# Altium PCB A00B02-PURE.PcbDoc
Units mil, origin at the board's own origin, x right, y up, seen from the top; angles counter-clockwise.
Board outline 2070.03 x 770.03 mil, 2 copper layers (Top Layer, Bottom Layer); 35 components, 26 nets, 117 pads, 172 vias.
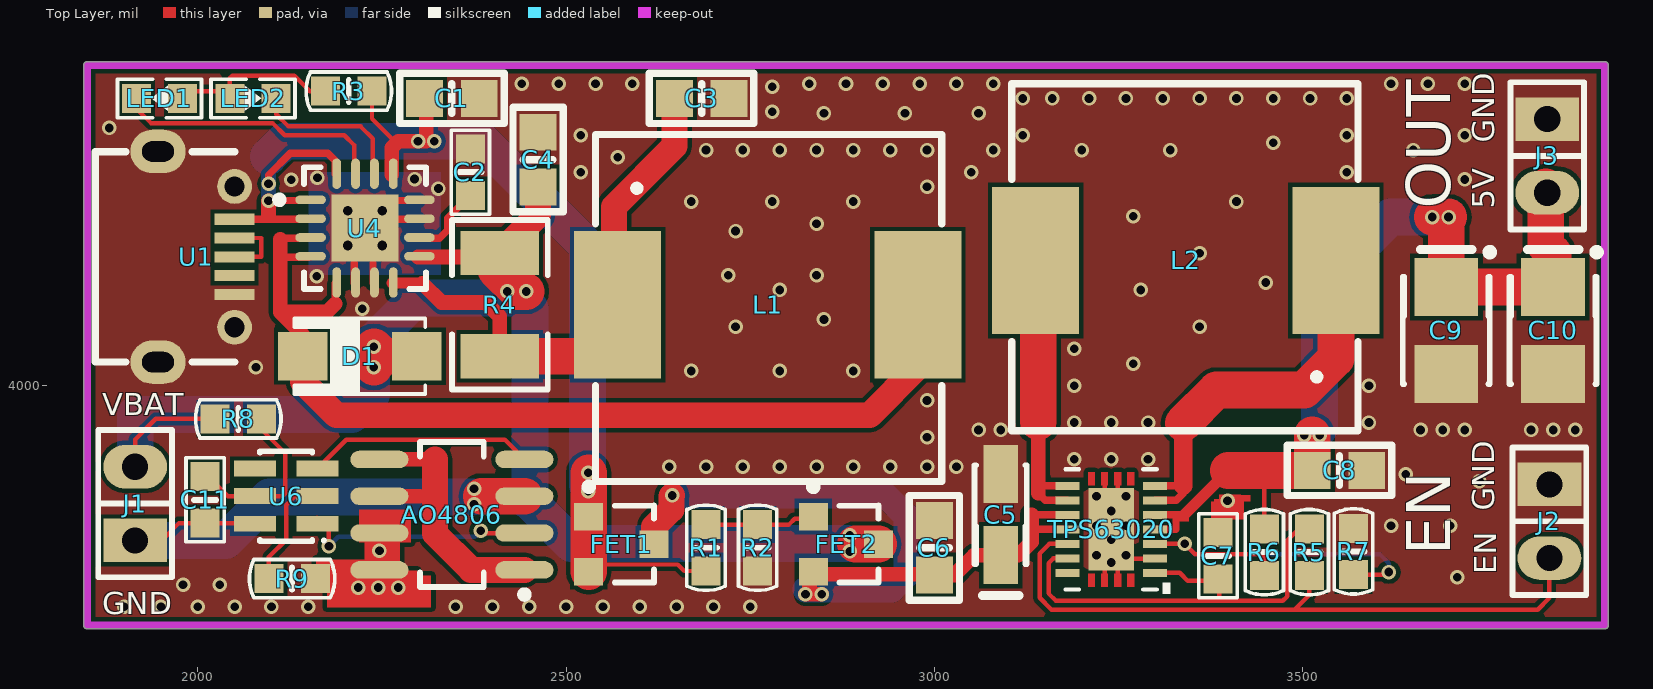
[diagram p0: Top Layer view]
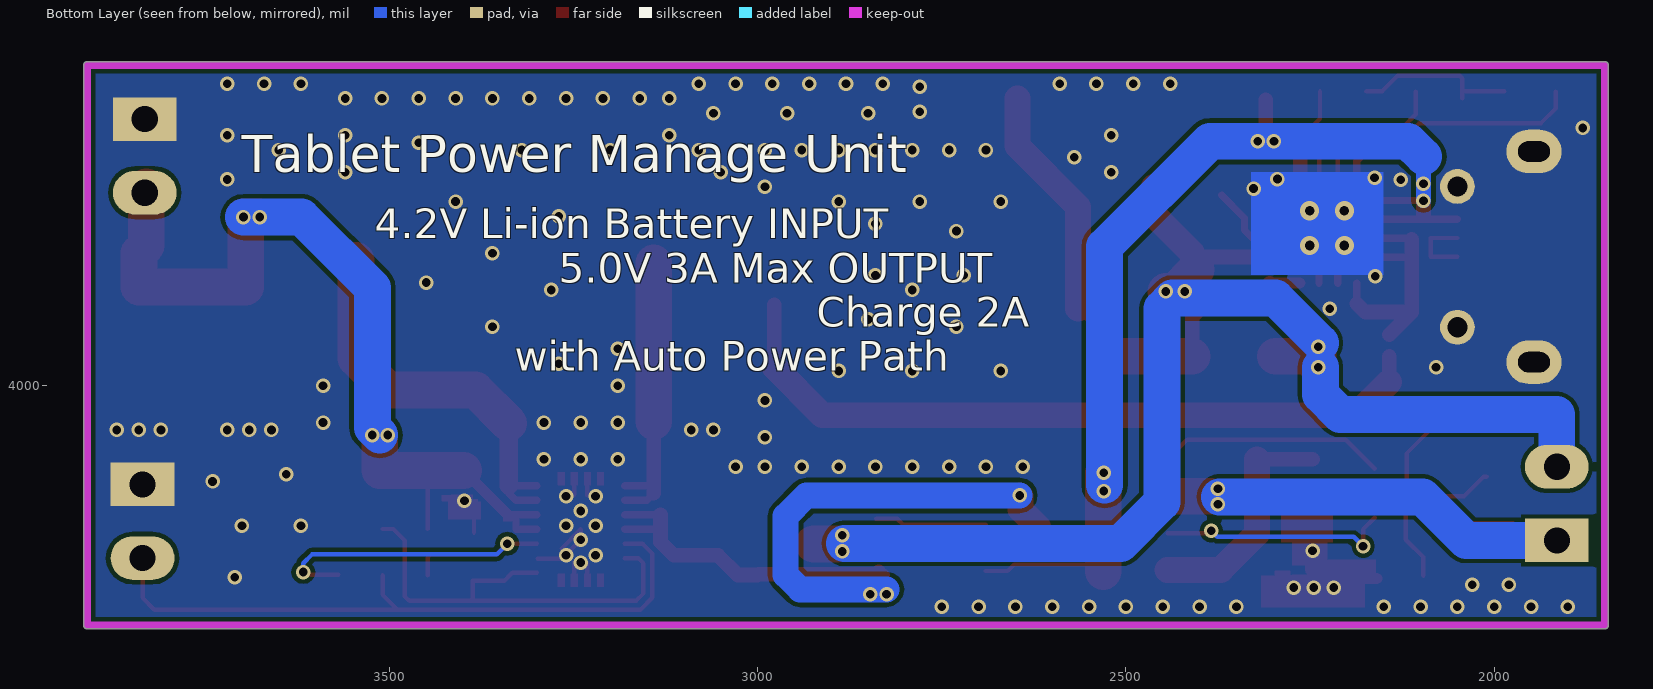
[diagram p1: Bottom Layer view, seen from below]

## Layer stack, top to bottom
Top Solder: solder mask 0.4, Solder Resist, Dk 3.5
Top Layer: signal copper 1.4
Dielectric 1: dielectric 12.6, FR-4, Dk 4.8
Bottom Layer: signal copper 1.4
Bottom Solder: solder mask 0.4, Solder Resist, Dk 3.5

## Board outline
1850,3669.99 cw(c1850,3675) 1844.98,3675 1844.98,4435 cw(c1850,4435) 1850,4440.02 3910,4440.02 cw(c3910,4435) 3915.01,4435 3915.01,3675 cw(c3910,3675) 3910,3669.99

## Design rules (kind name [scope] priority, off if disabled: settings)
Clearance [All] p1: gap=6
PlaneConnect PlaneConnect_1 [InNet('GND')] p1: planeconnectstyle=Direct reliefexpansion=20 reliefentries=4 reliefconductorwidth=10 reliefairgap=10
PlaneConnect [All] p2: planeconnectstyle=Relief reliefexpansion=20 reliefentries=4 reliefconductorwidth=10 reliefairgap=10
PolygonConnect PolygonConnect_1 [InNet('GND')] p1: connectstyle=Direct reliefconductorwidth=10 reliefentries=4 polygonreliefangle="90 Angle" airgapwidth=10
PolygonConnect [All] p2: connectstyle=Relief reliefconductorwidth=10 reliefentries=4 polygonreliefangle="90 Angle" airgapwidth=10
RoutingVias [All] p1: holewidth=28 width=50 viastyle="Through Hole" minholewidth=28 minwidth=50 maxholewidth=28 maxwidth=50
SolderMaskExpansion [All] p1: expansion=4
Width [All] p1: maxlimit=200 minlimit=6 preferedwidth=10 minimp=50.000000 maximp=50.000000 favimp=50.000000
29 further rules are at their usual default settings.

## Components (designator, comment, footprint, x,y, rotation, side; value= is the part's Value field where it differs from the comment)
AO4806 "U7" SOP-8 2345,3825 r180 top
C1 "22uF 0805" SMT_C_0805 2345,4390 r0 top
C2 "0.1uF" SMT_C_0603 2370,4290 r270 top
C3 "22uF 0805" SMT_C_0805 2684,4390 r0 top
C4 "22uF 0805" SMT_C_0805 2462,4307 r90 top
C5 "100uF 6.3V" SMT_C_Tantalum_A 3090,3825 r90 top
C6 "22uF 6.3V" SMT_C_0805 3000,3780 r90 top
C7 "0.1uF" SMT_C_0603 3385,3769 r90 top
C8 "22uF 6.3V" SMT_C_0805 3550,3885 r0 top
C9 "220uF 6.3V" SMT_C_Tantalum_B 3695,4075 r270 top
C10 "220uF 6.3V" SMT_C_Tantalum_B 3840,4075 r270 top
C11 "100nF" SMT_C_0603 2010,3845 r90 top
D1 "SS24" SMT_DIODE_DO_214AC 2220,4040 r180 top
FET1 "AO3402-N-Ch-MOSFET" AO3402-N-Ch-MOSFET 2575,3785 r270 top
FET2 "AO3401-P-Ch-MOSFET" AO3401-P-Ch-MOSFET 2880,3785 r270 top
J1 "THT_Male_P_1x2" THT_Male_P_1x2-2.54mm 1915,3790 r180 top
J2 "THT_Male_P_1x2" THT_Male_P_1x2-2.54mm 3835,3866 r0 top
J3 "THT_Male_P_1x2" THT_Male_P_1x2-2.54mm 3832,4362 r0 top
L1 "4.7uH" SMT_L_11.5mm 2775,4105 r0 top
L2 "1uH" SMT_L_11.5mm 3340,4175 r180 top
LED1 "SMT_LED_0603" SMT_LED_0603 1948,4390 r180 top
LED2 "SMT_LED_0603" SMT_LED_0603 2075,4390 r0 top
R1 "100oHm" SMT_R_0603 2690,3780 r90 top
R2 "5.6K" SMT_R_0603 2760,3780 r270 top
R3 "1K" SMT_R_0603 2205,4400 r0 top
R4 "0.05R" 1210 2410,4110 r270 top
R5 "12K" SMT_R_0603 3509,3774 r270 top
R6 "1M" SMT_R_0603 3448,3774 r90 top
R7 "180K" SMT_R_0603 3569,3775 r270 top
R8 "100R" SMT_R_0603 2055,3955 r0 top
R9 "1k" SMT_R_0603 2128,3738 r180 top
TPS63020 "U5" VSON-14 3240,3805 r180 top
U1 "USB_Micro_5S_B" USB_MICRO_5S_B 2050,4175 r90 top
U4 "TP5000" QFN-16 2227,4214 r0 top
U6 "DW01-PLUS" SOT23-6 2120,3850 r90 top

## Footprints (in the part's own frame and the unit in brackets; to place one, negate y for a bottom-side part, rotate by r counter-clockwise, add the part's x,y. Pads: shape width x height; smd on the part's side, far side on the other; paste and mask are expansions set on the pad)
1210 [mil] "贴片元件"
  rect 60x106.3 smd: 1(-70,0) 2(70,0)
  silkscreen extent -115,-65 115,65, body extent -65,-50 65,50, height 39
AO3401-P-Ch-MOSFET [mm] "AO3401-P-Ch-MOSFET"
  rect 0.95x1 smd: 1(-0.95,-1.125) 2(0.95,-1.125) 3(0,1.125)
  silkscreen extent -2.1,-1.25 1.32,1.13, body extent -1.45,-1.4 1.45,1.4, height 1.3
AO3402-N-Ch-MOSFET [mm] "AO3402-N-Ch-MOSFET"
  rect 0.95x1 smd: 1(-0.95,-1.125) 2(0.95,-1.125) 3(0,1.125)
  silkscreen extent -2.1,-1.25 1.32,1.13, body extent -1.45,-1.4 1.45,1.4, height 1.3
QFN-16 [mm] "QFN"
  oval 1.05x0.3 smd: 1(-1.875,0.975) 2(-1.875,0.325) 3(-1.875,-0.325) 4(-1.875,-0.975) 9(1.875,-0.975) 10(1.875,-0.325) 11(1.875,0.325) 12(1.875,0.975)
  oval 0.3x1.05 smd: 5(-0.975,-1.875) 6(-0.325,-1.875) 7(0.325,-1.875) 8(0.975,-1.875) 13(0.975,1.875) 14(0.325,1.875) 15(-0.325,1.875) 16(-0.975,1.875)
  rect 2.3x2.3 smd: 17(0,0)
  silkscreen extent -3.07,-2.1 2.1,2.1, body extent -2.07,-2.07 2.07,2.07, height 0.8
SMT_C_0603 [mm] "Surface mount capacitor 0603"
  rect 1x1 smd: 1(-0.8,0) 2(0.8,0)
  silkscreen extent -1.45,-0.66 1.45,0.66, body extent -1,-0.39 1,0.39, height 0.79
SMT_C_0805 [mil] "Surface mount capacitor 0805"
  rect 50x50 smd: 1(-37,0) 2(37,0)
  silkscreen extent -71,-34 71,34, body extent -49,-24 49,25, height 31
SMT_C_Tantalum_A [mm] "Capacitor, SM Tantalum; Body 3.2 x 1.6 mm (LxW typ)"
  rect 2x1.2 smd: 1(-1.4,0) 2(1.4,0)
  silkscreen extent -2.79,-0.9 1.7,0.9, body extent -1.6,-0.8 1.6,0.8, height 1.6
SMT_C_Tantalum_B [mm] "Capacitor, SM Tantalum; Body 3.5 x 2.8 mm (LxW typ)"
  rect 2x2.2 smd: 1(-1.5,0) 2(1.5,0)
  silkscreen extent -2.82,-1.5 1.85,1.63, body extent -1.75,-1.4 1.75,1.4, height 1.9
SMT_DIODE_DO_214AC [mm] "DO-214AC(SMA) Package"
  rect 1.7x1.67 smd: 1(-1.965,0) 2(1.965,0)
  silkscreen extent -2.25,-1.3 2.25,1.3, body extent -2.6,-1.3 2.6,1.3, height 2.35
SMT_L_11.5mm [mil] "Vishay HLP4040 SMT Inductor,11.5x11.5x4mm"
  rect 118.11x200 smd: 1(-205,5) 2(202.5,5)
  silkscreen extent -235,-235 235,236, body extent -236,-235 235,236, height 157
SMT_LED_0603 [mm] "SMT LED"
  rect 1x1 smd: 1(-0.8,0) 2(0.8,0)
  silkscreen extent -1.45,-0.66 1.45,0.66, body extent -0.81,-0.4 0.81,0.4, height 0.6
SMT_R_0603 [mm] "Surface mount resistor 0603"
  rect 1x1 smd: 1(-0.8,0) 2(0.8,0)
  silkscreen extent -1.47,-0.66 1.47,0.66, body extent -1,-0.39 1,0.39, height 0.79
SOP-8 [mm] "8-Pin Small Outline Integrated Circuit 1.27 mm Pitch, IPC Low Density"
  oval 2x0.6 smd: 1(-2.5,1.905) 2(-2.5,0.635) 3(-2.5,-0.635) 4(-2.5,-1.905) 5(2.5,-1.905) 6(2.5,-0.635) 7(2.5,0.635) 8(2.5,1.905)
  silkscreen extent -2.63,-2.5 1.1,2.88, body extent -2.92,-2.45 2.86,2.45, height 1.45
SOT23-6 [mm] "SOT-457/SC-74; 6 Leads; Body 3 x 3 mm, inc. leads (LxW max)"
  rect 0.55x1.45 smd: 1(-0.95,-1.075) 2(0,-1.075) 3(0.95,-1.075) 4(0.95,1.075) 5(0,1.075) 6(-0.95,1.075)
  silkscreen extent -1.57,-1.35 1.55,0.9, body extent -1.45,-1.4 1.45,1.4, height 1.45
THT_Male_P_1x2-2.54mm [mm] "THT Male pin header strip 1x2 2.54mm pitch"
  rect 2.2x1.5 hole 0.9: 1(0,0)
  oval 2.2x1.5 hole 0.9: 2(0,-2.54)
  silkscreen extent -1.27,-3.81 1.27,1.27, body extent -1.46,-3.81 1.46,1.27, height 8.51
USB_MICRO_5S_B [mil] "USB Micro SMT 5S B"
  rect 15x54 smd: 1(51,0) 2(25.5,0) 3(0,0) 4(-25.5,0) 5(-51,0)
  oval 59.06x74.8 hole 27.56 slot 43.31 at 90 deg: 6(-143,104) 7(143,104)
  round 47.24 hole 27.5: 8(95.5,0) 9(-95.5,0)
  silkscreen extent -143,0 143,189, body extent -161,-9 161,204, height 105
VSON-14 [mm]
  rect 0.82x0.28 smd paste-0.397: 1(-1.51,1.5) 2(-1.51,1) 3(-1.51,0.5) 4(-1.51,0) 5(-1.51,-0.5) 6(-1.51,-1) 7(-1.51,-1.5) 8(1.51,-1.5) 9(1.51,-1) 10(1.51,-0.5) 11(1.51,0) 12(1.51,0.5) 13(1.51,1) 14(1.51,1.5)
  rect 1.58x2.85 smd paste-1.412 mask-1.41: 15(0,0)
  Top Layer region: -0.56,1.975 -0.56,1.527 -0.79,1.527 -0.79,1.975
  Top Layer region: -0.11,1.975 -0.11,1.527 -0.34,1.527 -0.34,1.975
  Top Layer region: 0.11,1.975 0.11,1.527 0.34,1.527 0.34,1.975
  Top Layer region: 0.56,1.975 0.56,1.527 0.79,1.527 0.79,1.975
  Top Layer region: 0.56,-1.975 0.56,-1.527 0.79,-1.527 0.79,-1.975
  Top Layer region: 0.11,-1.975 0.11,-1.527 0.34,-1.527 0.34,-1.975
  Top Layer region: -0.11,-1.975 -0.11,-1.527 -0.34,-1.527 -0.34,-1.975
  Top Layer region: -0.56,-1.975 -0.56,-1.527 -0.79,-1.527 -0.79,-1.975
  silkscreen extent -2.03,-2.07 1.58,2.22

## Part data
AO4806: library part AO4806
C1 C3 C4 C6 C8: library part SMT_C_0805, "Surface mount capacitor 0805"
C2 C7 C11: library part SMT_C_0603, "Surface mount capacitor 0603"
C5: library part SMT_C_Tantalum_A, "Capacitor, SM Tantalum; Body 3.2 x 1.6 mm (LxW typ)"
C9 C10: library part SMT_C_Tantalum_B, "Capacitor, SM Tantalum; Body 3.5 x 2.8 mm (LxW typ)"
D1: library part SMT_DIODE_SCHOTTKY_DO_214AC, "Surface mount schottky diode DO-214AC(SMA) Package"
FET1: "AO3402-N-Ch,4A,30V.RDS(ON) = 0.11Ω @ VGS = 2.5V"
FET2: "AO3401-P-Ch,-4.2A, -30V.RDS(ON) = 0.12Ω @ VGS = -2.5 V"
J1 J2 J3: "THT Male pin header strip 1x2"
L1 L2: library part SMT_L_11.5mm, "Vishay HLP4040 SMT Inductor,11.5x11.5x4mm"
LED1 LED2: "SMT LED"
R1 R2 R3 R5 R6 R7 R8 R9: library part SMT_R_0603, "Surface mount resistor 0603"
R4: library part SMT_R_0805, "Surface mount resistor 0805"
TPS63020: library part TPS63020
U1: "USB micro female SMT with 4 fixed foot"
U6: "One Cell Lithium-ion/Polymer Battery Protection IC"

## Via types
v1: diameter 19.68, hole 11.81, Top Layer to Bottom Layer, tented both sides, 168 vias
v2: diameter 25.98, hole 12.99, Top Layer to Bottom Layer, tented both sides, 4 vias

## Nets (pads, with @x,y where several pads share a name; then routed paths per layer and width w, separated by ;. In a path a pad name is that pad's centre, name@x,y a point inside that pad or via, vN(x,y) a via of type N, cw(c..) or ccw(c..) an arc to the next point about the centre after c; other vN are vias at no path point)
BAT_GND: AO4806.3 C11.1 J1.1 U6.6 | length 712.4
  Top Layer w6: J1.1 1951,3790 1974.5,3813.5 C11.1 U6.6@2076.77,3813.5
  Top Layer w50: 2385,3850 AO4806.3
  Bottom Layer w50: J1.1 2038,3790 2097,3849 2373,3849
  other v1: 2375,3839 2375,3860
CHG_STDBY: LED2.2 U4.14 | length 224
  Top Layer w6: LED2.2@2106.5,4399 2106.5,4368.5 2123,4352 2221,4352 2237.8,4335.2 U4.14@2237.8,4286.82
EN: J2.2 R5.2 TPS63020.12 | length 917.2
  Top Layer w6: TPS63020.12 3156.18,3785.31 3143,3772.13 3143,3712 3159,3696 3489,3696 ; R5.2 3509,3716 3489,3696 ; J2.2 3835,3712 3819,3696 3489,3696
GND: AO4806.7 AO4806.8 C1.2 C2.1 C3.2 C4.2 C5.2 C6.2 C7.2 C8.2 C9.2 C10.2 J2.1 J3.1 R2.2 R7.1 R9.1 TPS63020.2 TPS63020.15 U1.5 U1.6 U1.7 U1.8 U1.9 U4.6 U4.7 U4.11 U4.12 U4.17 | length 454
  Top Layer w6: TPS63020.15@3266,3779 TPS63020.15 v1(3240,3791) 3266,3765 TPS63020.2@3298.82,3765 ; C7.2 3385,3831 v1(3398,3844)
  Top Layer w10: U4.6@2212.2,4139.18 2212.2,4166.27 ; U4.7@2237.8,4139.18 2237.8,4166.27 ; U4.17@2263,4251.39 U4.12@2298.82,4251.39 ; U4.17@2271.73,4225.8 U4.11@2298.82,4225.8
  Top Layer w15: R9.1 2184,3738 2194,3748 AO4806.8@2219,3748
  Top Layer w20: AO4806.8 AO4806.7
  Top Layer w35: v1(2218,3726) v1(2272,3726)
  other v1: 1900,3700 1950,3700 2000,3700 2050,3700 2100,3700 2150,3700 2350,3700 2400,3700 2450,3700 2500,3700 2550,3700 2600,3700 2650,3700 2700,3700 2750,3700 2245,3726 1980,3730 2030,3730 3710,3740 3240,3760 3220,3770 3260,3770 2246.57,3776 3220,3810 3260,3810 3620,3810 3700,3810 3240,3830 3220,3850 3260,3850 3740,3870 3640,3880 2640,3890 2690,3890 2740,3890 2790,3890 2840,3890 2890,3890 2940,3890 2990,3890 3030,3890 3190,3900 3240,3900 3290,3900 2990,3930 3060,3940 3090,3940 3660,3940 3690,3940 3720,3940 3810,3940 3840,3940 3870,3940 3190,3950 3240,3950 3290,3950 3590,3950 2990,3980 3190,4000 3590,4000 2670,4020 2790,4020 2890,4020 2079,4025 3270,4030 3190,4050 2730,4080 3360,4080 2850,4090 2223.43,4104.33 2790,4130 3280,4130 3450,4140 2161.42,4148.62 2720,4150 2840,4150 3360,4180 2730,4210 2840,4220 3270,4230 2670,4250 2780,4250 2890,4250 3410,4250 2326.77,4267.72 2990,4270 2126.97,4279.53 3720,4280 2294.29,4280.51 2162.4,4282.48 2520,4290 3050,4290 3560,4290 2570,4310 2690,4320 2740,4320 2790,4320 2840,4320 2890,4320 2940,4320 2990,4320 3080,4320 3200,4320 3320,4320 3650,4320 3460,4330 2520,4340 3120,4340 3560,4340 3720,4340 1880,4350 2850,4370 2960,4370 3060,4370 2780,4372 3120,4390 3160,4390 3210,4390 3260,4390 3310,4390 3360,4390 3410,4390 3460,4390 3510,4390 3560,4390 2780,4406 2440,4410 2490,4410 2540,4410 2590,4410 2830,4410 2880,4410 2930,4410 2980,4410 3030,4410 3080,4410 3620,4410 3670,4410 3720,4410
LED_CHRG: LED1.2 U4.15 | length 378.8
  Top Layer w6: LED1.2@1916.5,4399 1916.5,4376.5 1936.47,4356.53 2101.5,4356.53 2118.03,4340 2199,4340 2212.2,4326.8 U4.15@2212.2,4286.82
NetAO4806_1: AO4806.1 AO4806.5 AO4806.6 | length 372.6
  Top Layer w20: AO4806.6 2301,3850 ; AO4806.5 2322,3900
  Top Layer w35: 2322,3900 2322,3799 2371,3750 AO4806.1
NetAO4806_2: AO4806.2 U6.1 | length 313.4
  Top Layer w6: U6.1@2162.32,3820.81 2178,3805.13 v1(2178,3782) ; v1@2390,3800 AO4806.2
  Bottom Layer w6: v1(2178,3782) 2190.84,3794.84 2375.84,3794.84 v1(2384,3803)
NetAO4806_4: AO4806.4 U6.3 | length 308.3
  Top Layer w6: U6.3 2201.42,3926.5 2416.93,3926.5 AO4806.4
NetC2_2: C2.2 U4.10 | length 105
  Top Layer w10: U4.10@2298.82,4200.2 2328.2,4200.2 2339,4211 2339,4227.5 C2.2
NetC3_1: C3.1 L1.1 R4.2 U4.8 | length 734.9
  Top Layer w10: L1.1@2525,4040 2525,4065 L1.1@2565,4105
  Top Layer w15: U4.8@2263.39,4139.18 2304.82,4139.18
  Top Layer w20: 2304.82,4139.18 2331,4113 2391,4113 2410,4094 R4.2
  Top Layer w35: L1.1@2565,4105 2565,4243 2647,4325 C3.1
  Top Layer w50: R4.2 L1.1@2525,4040
NetC7_1: C7.1 R5.1 TPS63020.1 TPS63020.13 | length 632.7
  Top Layer w6: TPS63020.13 3161.63,3765.63 3155,3759 3155,3718 3165,3708 3390,3708 ; TPS63020.1 3333.06,3745.94 3344,3735 3387,3735 3387,3711 3390,3708 ; R5.1 3494.5,3805.5 3479,3790 3479,3714 3473,3708 3390,3708
NetC11_2: C11.2 R8.2 U6.5 | length 236.1
  Top Layer w6: C11.2 2014.5,3876.5 2041,3850 U6.5 2115,3850 2119,3854 2119,3908 2086.5,3940.5 R8.2
NetD1_2: D1.2 L1.2 U4.3 U4.4 U4.5 | length 1325.5
  Top Layer w10: 2112,4198.41 2113.8,4200.2 U4.3@2151.18,4200.2 ; 2114.39,4174.61 U4.4@2151.18,4174.61 ; 2186.61,4111.39 U4.5@2186.61,4139.18
  Top Layer w20: 2112,4198.41 2112,4100 ; 2142.64,4005.36 D1.2 ; D1.2@2142.64,4069.36 2112,4100 ; 2186.61,4111.39 2175.23,4100 2112,4100 ; L1.2@2977.5,4025.5 L1.2
  Top Layer w35: 2142.64,4005.36 2188,3960 2912,3960 L1.2@2977.5,4025.5
NetFET2_1: FET2.1 R1.2 R2.1 | length 152
  Top Layer w6: R1.2 R2.1 2802.5,3811.5 2810.4,3819.4 FET2.1@2838.71,3819.4
NetL2_1: L2.1 TPS63020.6 TPS63020.7 | length 552.5
  Top Layer w10: TPS63020.6 3328.37,3844.37 3337.94,3853.94 3337.94,3864.06 TPS63020.7
  Top Layer w25: 3337.94,3864.06 3337.94,3948.94
  Top Layer w50: 3337.94,3948.94 3383,3994 3502,3994 3545,4037 L2.1
NetL2_2: L2.2 TPS63020.8 TPS63020.9 | length 391.6
  Top Layer w10: 3141,3854 3150.63,3844.37 TPS63020.9 ; 3144.94,3864.06 TPS63020.8
  Top Layer w20: 3141,3854 3141,3951
  Top Layer w50: 3141,3951 L2.2@3141,4166.5
NetLED1_1: LED1.1 LED2.1 R3.1 | length 224.7
  Top Layer w6: LED1.1@1986.5,4400 LED2.1@2043.5,4400 ; LED2.1 LED2.1@2043.5,4400 ; R3.1 2152,4400 2131,4421 2047,4421 2043.5,4417.5 LED2.1@2043.5,4400
NetR6_1: R6.1 R7.2 TPS63020.3 | length 525.4
  Top Layer w6: TPS63020.3 v1(3339.68,3785.32) 3354,3771 3444,3771 3448,3767 R6.1 ; R7.2 v1@3613.5,3743.5
  Bottom Layer w6: v1(3339.68,3785.32) 3354,3771 3605,3771 3617,3759 v1(3617,3747)
NetR9_2: R9.2 U6.2 | length 153
  Top Layer w6: R9.2@2096.5,3742 2096.5,3767.5 2120,3791 2120,3838 2132,3850 U6.2
NetU1_2: U1.2 U1.3 | length 97.5
  Top Layer w6: U1.3 2086,4175 2086,4200.5 U1.2
NetU2_2: 
NetU3_2: 
VCC_BAT: C4.1 D1.1 FET2.3 J1.2 R4.1 R8.1 U4.9 | length 1954.5
  Top Layer w6: J1.2 1915,3927 1943,3955 R8.1
  Top Layer w20: U4.9@2298.82,4174.61 R4.1@2404.61,4174.61
  Top Layer w35: R4.1 2462,4232 C4.1
  Top Layer w50: v1(2239,4025) v1(2239,4053) 2252,4040 D1.1 ; R4.1@2404.61,4157.37 2433.98,4128 v1(2446,4128) ; 2893,3785 FET2.3
  Bottom Layer w50: J1.2 1915,3961 2209,3961 2236,3988 v1@2236,4025 ; v1@2236,4058 2297,4119 2437,4119 2451,4105 2451,3842 2507,3786 2882,3786
  other v1: 2885,3775 2885,3797 2420,4128
VCC_INPUT: C1.1 FET1.1 FET1.2 R1.1 R3.2 U1.1 U4.1 U4.2 U4.13 U4.16 | length 1727.3
  Top Layer w6: R3.2 2236.5,4362.5 2263.39,4335.61 2263.39,4323 ; FET1.2 2540.41,3757.3 2651.7,3757.3 2660.5,3748.5 R1.1
  Top Layer w10: U1.1 U4.2@2149.39,4226 ; v1@2096,4251.39 U4.1@2151.18,4251.39 ; v1(2096,4274) 2096,4286 2125.39,4315.39 2176.61,4315.39 2186.61,4305.39 U4.16@2186.61,4286.82
  Top Layer w20: 2096,4232 v1(2096,4251) ; U4.13@2263.39,4286.82 2263.39,4323 2272.39,4332 v1(2299,4332) 2310,4332 C1.1@2310,4388
  Top Layer w50: FET1.2 v1@2530.71,3881.29
  Bottom Layer w20: v1(2096,4251) 2096,4311
  Bottom Layer w50: 2096,4311 2117,4332 v1(2321,4332) 2386,4332 2529,4189 v1@2529,3865
  other v1: 2530,3857 2530,3882
VCC_VBUS: C5.1 C6.1 FET1.3 FET2.2 TPS63020.10 TPS63020.11 | length 1126.7
  Top Layer w10: 3131.88,3824.68 TPS63020.10 ; 3135,3805 TPS63020.11
  Top Layer w20: v1(2825,3717) v1@2830.5,3717 ; FET2.2@2830.5,3742.39 v1@2830.5,3717 ; FET2.2 2835.71,3744 C6.1@2999,3744 ; v1(2847,3717) v1@2830.5,3717 ; C6.1 3027,3743 3053.88,3769.88 C5.1 3113.88,3769.88 3131.88,3787.88 3131.88,3824.68
  Top Layer w35: FET1.3 2619.29,3808.29 2643,3832 2643,3850 v1(2644,3851)
  Bottom Layer w35: v1(2644,3851) 2934,3851 2962,3823 2962,3743 2942.5,3723.5 v1@2825,3723.5
VDD_5V: C8.1 C9.1 C10.1 J3.2 R6.2 TPS63020.4 TPS63020.5 | length 1234.7
  Top Layer w6: R6.2 3448,3883
  Top Layer w10: TPS63020.4 3328,3805 3328,3824 3327.31,3824.69 ; TPS63020.5 3327.31,3824.69 ; 3338.69,3824.69 3327.31,3824.69
  Top Layer w15: 3338.69,3824.69 3399,3885
  Top Layer w50: 3399,3885 C8.1 3513,3933 ; v1(3676,4229) v1(3698,4229) 3695,4226 C9.1 C10.1 3840,4180 3830,4190 J3.2@3830,4270
  Bottom Layer w50: 3513,3933 3523,3943 3523,4133 3619,4229 v1(3698,4229)
  other v1: 3502,3933 3523,3933
pads on no net: TPS63020.14 U1.4 U6.4
copper on no net: | length 56.7
  Top Layer w6: 3231.14,3744.9 3231.14,3759.02 ; 3231.14,3851.22 3231.14,3865.1 ; 3248.86,3744.9 3248.86,3760.67 ; 3248.86,3852.2 3248.86,3865.1
  other v2: 2203.38,4190.38 2250.62,4190.38 2203.38,4237.62 2250.62,4237.62

## Polygon pours and split planes (outlines as drawn)
GND on Top Layer "Top Layer-No Net" (solid, remove dead copper, pour order 0): 1850,4435 1850,3675 3910,3675 3910,4435
GND on Bottom Layer "Top Layer-No Net" (solid, remove dead copper, pour order 2): 1850,4435 1850,3675 3904,3675 3910,3675 3910,4435

## Keep-outs
Keep-Out Layer:
  lines w10: 1850,3675 3910,3675 3910,3725 3910,4420 3910,4435 1850,4435 1850,3675

## Other copper
Top Layer:
  rectangle net GND: 2219.02,3787.4 2289.37,3831.84
  rectangle net GND: 2160.43,3733.27 2252.95,3763.78
  rectangle net GND: 2226.38,3755.91 2274.61,3791.34
  rectangle net GND: 2276.57,3737.2 2298.23,3749.02
  rectangle net GND: 2175.2,3698.82 2316.93,3742.13
  rectangle net VDD_5V: 3327.31,3815.94 3345.47,3824.69
  rectangle net GND: 3375.82,3818.5 3420.28,3842.52
  rectangle net GND: 3386.6,3842.52 3429.13,3851.5
  rectangle net GND: 3379.78,3834.51 3387.34,3846.32
  rectangle net GND: 3386.07,3850.39 3416.34,3852.11
Bottom Layer:
  rectangle net GND: 2150,4150 2330,4290
  rectangle net GND: 2166.34,4157.48 2291.34,4273.62

## Silkscreen, mask and mechanical layers (free items; w line width, h text height)
Top Overlay:
  text "GND" at 3760,4330 h30 r90
  text "OUT" at 3700,4240 h60 r90
  text "5V" at 3760,4240 h30 r90
  text "VBAT" at 1870,3960 h30
  text "GND" at 3760,3830 h30 r90
  text "EN" at 3700,3770 h60 r90
  text "EN" at 3763,3744 h30 r90
  text "GND" at 1870,3690 h30
Bottom Overlay:
  text "Tablet Power Manage Unit" at 3700,4290 h50
  text "4.2V Li-ion Battery INPUT" at 3520,4200 h40
  text "5.0V 3A Max OUTPUT" at 3270,4140 h40
  text "Charge 2A" at 2920,4080 h40
  text "with Auto Power Path" at 3330,4020 h40
Top Solder:
  rectangle: 3204.9,3752.9 3268.49,3857.1
  rectangle: 1880,4240 2000,4280
  rectangle: 1880,4180 2000,4240
  rectangle: 1880,4100 2000,4170
  rectangle: 1880,4070 2000,4100
  lines w10: 2112,4200 2112,4105 2139,4078 ; 2116,4101 2175,4101 ; 2135,4003 2135,4000 2183,3952 2917,3952 2976,4011 ; 2157,4004 2157,4000 2191,3966 2905,3966 2949,4010 ; 2282,3900 2322,3900 2324,3898 2324,3798 2372,3750 2454,3750 ; 2284,3851 2324,3851 ; 2449,4040 2515,4040 ; 2457,4024 2524,4024 ; 2463,4055 2539,4055 ; 3122,4066 3122,3948 3140,3930 ; 3139,3954 3139,4067 ; 3140,3854 3140,3930 ; 3163,4081 3157,4075 3157,3952 3140,3935 3140,3930 ; 3338,3866 3338,3926 ; 3340,3826 3385,3871 ; 3391,3886 3493,3886 ; 3488,3901 3395,3901 3385,3891 3385,3871 ; 3504,3871 3385,3871 ; 3529,4067 3529,4043 3500,4014 3495,4009 3380,4009 3324,3953 3324,3940 3338,3926 ; 3545,4066 3545,4037 3503,3995 3386,3995 3338,3947 3338,3926 ; 3561,4066 3561,4029 3509,3977 3397,3977 3390,3977 3339,3926 3338,3926 ; 3680,4153 3680,4210 3680,4225 ; 3694,4145 3694,4212 3694,4225 ; 3708,4135 3708,4218 ; 3718,4140 3804,4140 ; 3723,4117 3830,4117 3846,4133 ; 3723,4128 3796,4128 ; 3731,4152 3822,4152 ; 3732,4127 3738,4133 ; 3813,4165 3813,4229 ; 3826,4154 3826,4230 ; 3838,4150 3838,4231 ; 3850,4146 3850,4230
Bottom Solder:
  lines w10: 1902,3921 1902,3960 1919,3977 2193,3977 2220,4004 2220,4067 2279,4126 2287,4134 2455,4134 2466,4123 2466,3852 2514,3804 2878,3804 2878,3768 2506,3768 2435,3839 2435,4097 2429,4103 2302,4103 2253,4054 2253,3987 2211,3945 1936,3945 1933,3942 1933,3920 ; 1916,3920 1916,3953 1925,3962 2200,3962 2236,3998 2236,4060 2295,4119 2438,4119 2452,4105 2452,3843 2509,3786 2877,3786 ; 1952,3787 2038,3787 2097,3846 2101,3850 2375,3850 ; 1952,3803 2030,3803 2090,3863 2372,3863 ; 1958,3774 2045,3774 2105,3834 2370,3834 ; 2078,4315 2110,4347 2392,4347 2545,4194 2545,3910 2545,3872 2536,3863 ; 2084,4301 2085,4301 2116,4332 2384,4332 2529,4187 2529,3868 2521,3860 ; 2097,4292 2099,4292 2121,4314 2378,4314 2513,4179 2513,3874 2530,3857 ; 2644,3851 2932,3851 2960,3823 2960,3739 2938,3717 2839,3717 ; 3502,3933 3509,3940 3509,4141 3608,4240 3665,4240 3665,4218 3658,4211 3623,4211 3537,4125 3537,3941 3510,3941 ; 3523,3933 3523,4132 3617,4226 3673,4226 3676,4229
  text "Designed By" at 3430,3930 h40
  text "MARTINT3CH" at 2970,3920 h40